# Altium PCB PCB.PcbDoc
Units mm, origin at the board's own origin, x right, y up, seen from the top; angles counter-clockwise.
Board outline 132.5 x 50 mm, 2 copper layers (Top Layer, Bottom Layer); 79 components, 66 nets, 304 pads, 112 vias.
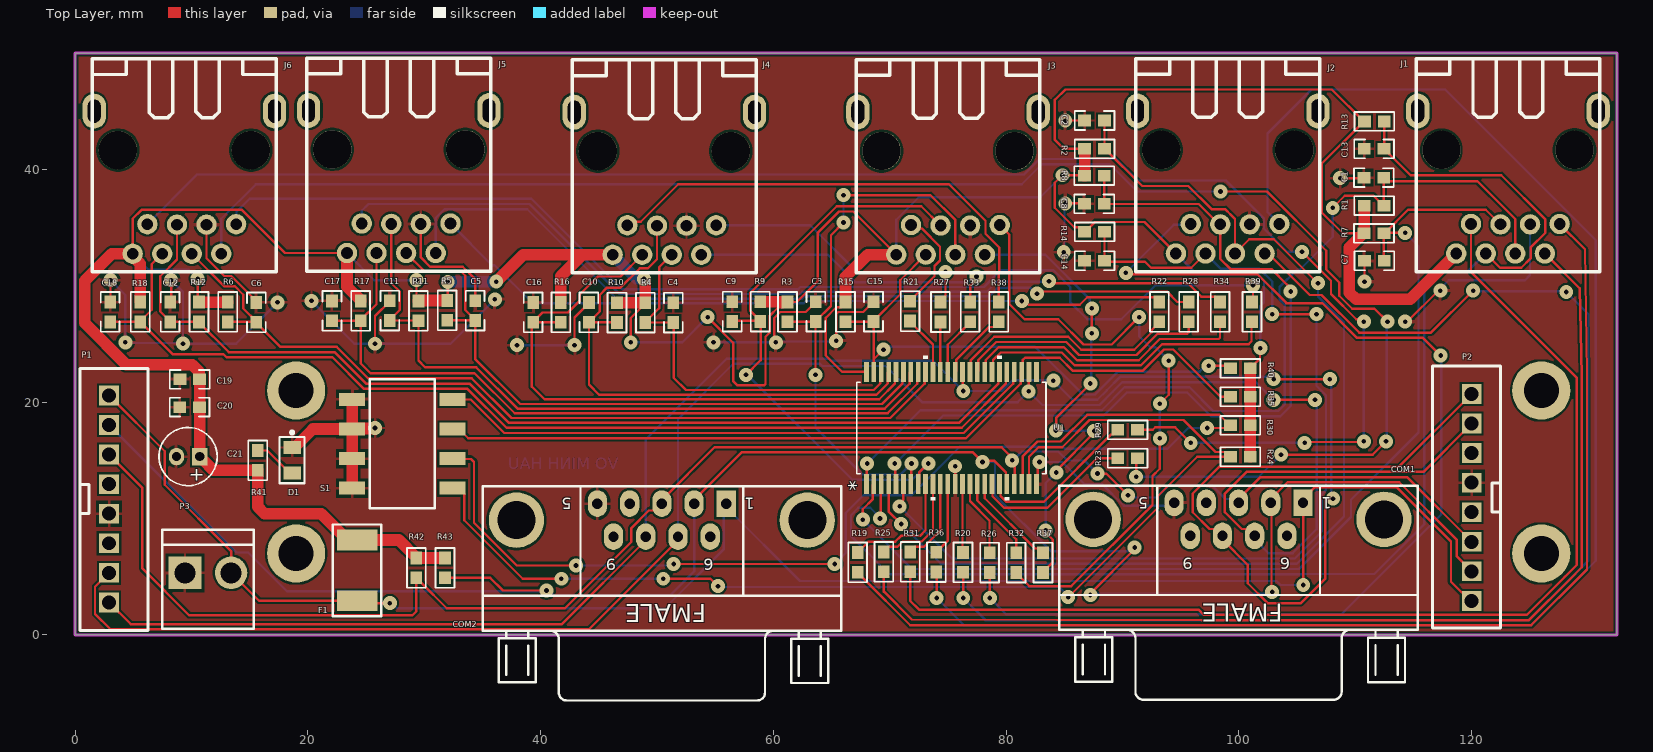
[diagram p0: Top Layer view]
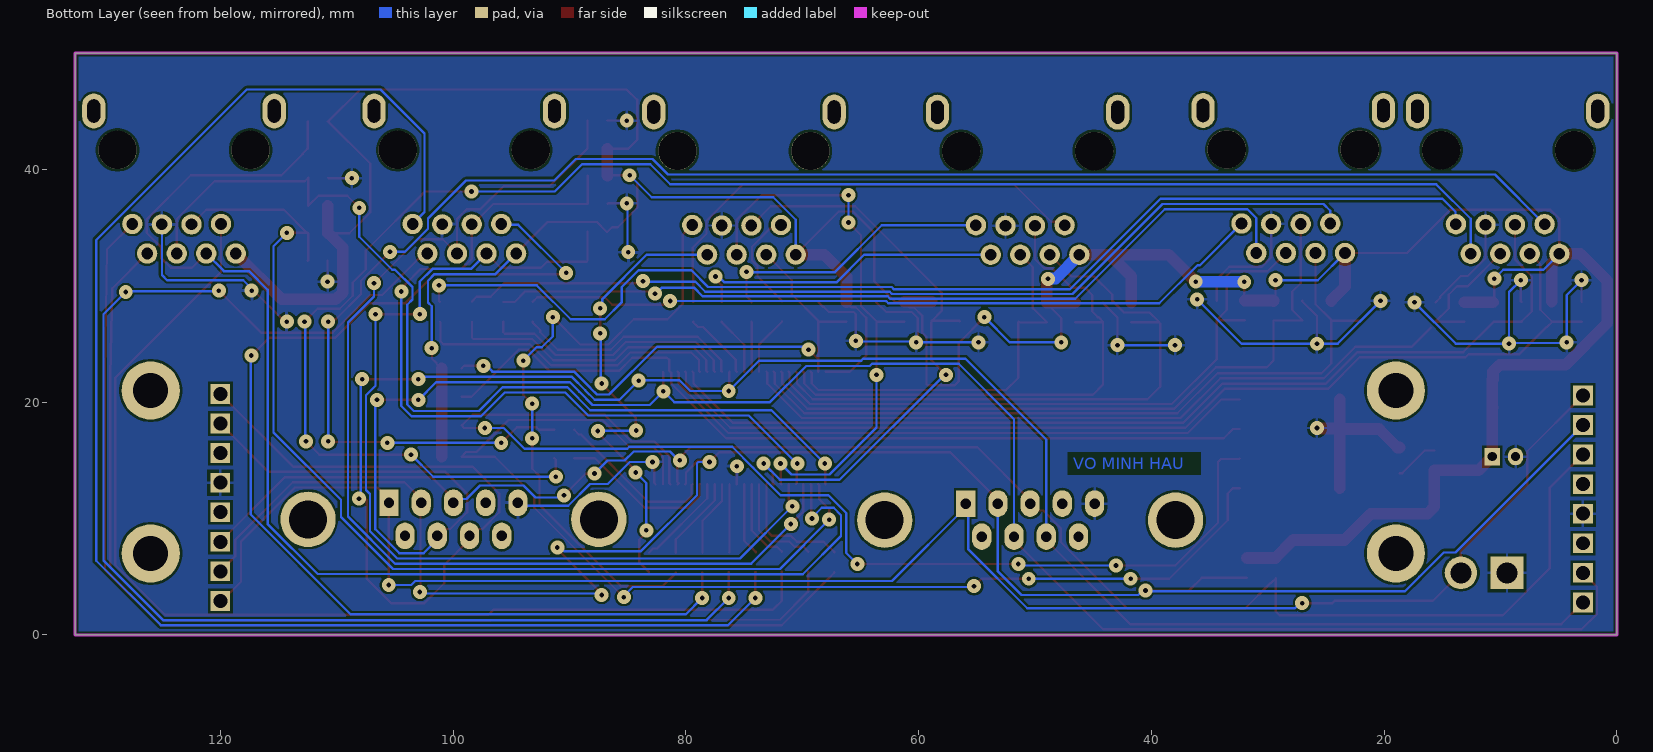
[diagram p1: Bottom Layer view, seen from below]
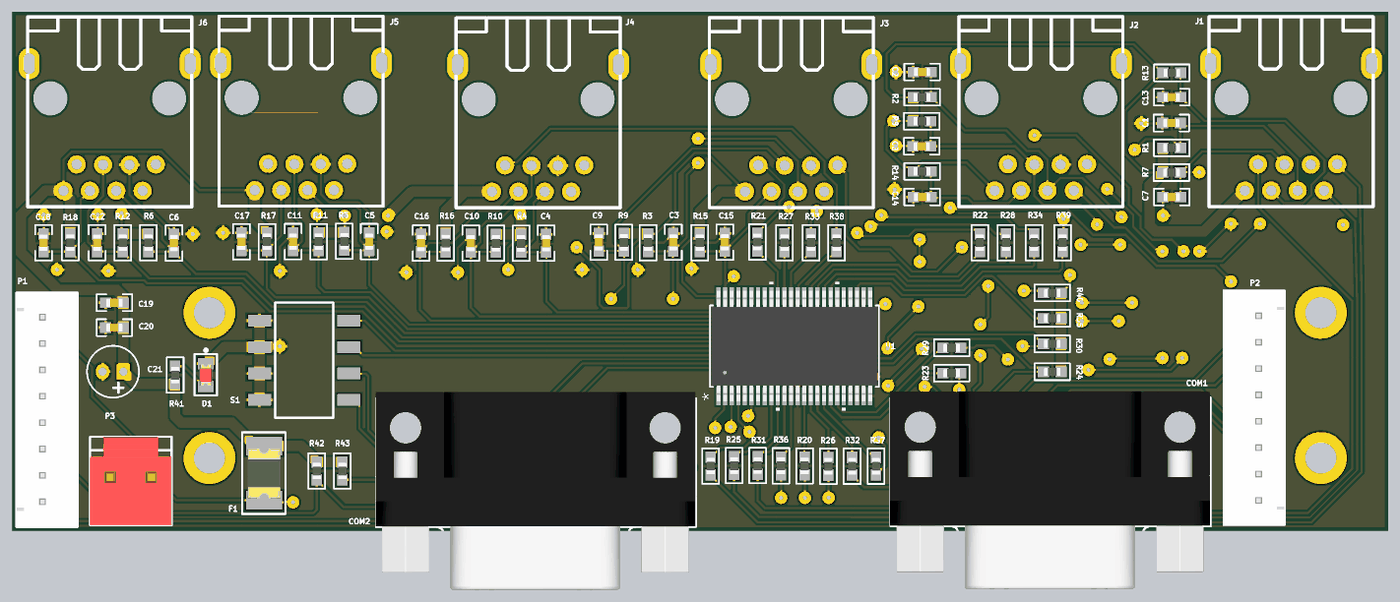
[diagram p2: 3D render of the assembled board from above, using the file's embedded part models]

## Layer stack, top to bottom
Top Solder: solder mask 0.0102, Solder Resist, Dk 3.5
Top Layer: signal copper 0.0356
Dielectric 1: dielectric 0.32, FR-4, Dk 4.8
Bottom Layer: signal copper 0.0356
Bottom Solder: solder mask 0.0102, Solder Resist, Dk 3.5

## Board outline
0,0 0,50 132.5,50 132.5,0

## Design rules (kind name [scope] priority, off if disabled: settings)
Clearance [All] p1: gap=0.2 ignorepadtopadclearanceinfootprint=FALSE
PolygonConnect [All] p1: connectstyle=Relief reliefconductorwidth=0.254 reliefentries=4 polygonreliefangle="90 Angle" airgapwidth=0.254
RoutingVias [All] p1: holewidth=0.4 width=1.2 viastyle="Through Hole" minholewidth=0.4 minwidth=1.2 maxholewidth=0.4 maxwidth=1.2
SolderMaskExpansion [All] p1: expansion=0.102 istentingtop=FALSE
Width [All] p1: maxlimit=1 minlimit=0.2 preferedwidth=0.5
30 further rules are at their usual default settings.

## Components (designator, comment, footprint, x,y, rotation, side; value= is the part's Value field where it differs from the comment)
C1 "0.1uF" "CAPC-0603 (1608)" 111.606,39.289 r0 top value=104/50V
C2 "0.1uF" "CAPC-0603 (1608)" 87.607,44.204 r0 top value=104/50V
C3 "0.1uF" "CAPC-0603 (1608)" 63.664,27.781 r270 top value=104/50V
C4 "0.1uF" "CAPC-0603 (1608)" 51.414,27.696 r270 top value=104/50V
C5 "0.1uF" "CAPC-0603 (1608)" 34.38,27.862 r270 top value=104/50V
C6 "0.1uF" "CAPC-0603 (1608)" 15.584,27.72 r270 top value=104/50V
C7 "0.1uF" "CAPC-0603 (1608)" 111.651,32.149 r0 top value=104/50V
C8 "0.1uF" "CAPC-0603 (1608)" 87.583,37.035 r0 top value=104/50V
C9 "0.1uF" "CAPC-0603 (1608)" 56.479,27.781 r270 top value=104/50V
C10 "0.1uF" "CAPC-0603 (1608)" 44.161,27.71 r270 top value=104/50V
C11 "0.1uF" "CAPC-0603 (1608)" 27.05,27.862 r270 top value=104/50V
C12 "0.1uF" "CAPC-0603 (1608)" 8.176,27.749 r270 top value=104/50V
C13 "0.1uF" "CAPC-0603 (1608)" 111.64,41.764 r0 top value=104/50V
C14 "0.1uF" "CAPC-0603 (1608)" 87.607,32.149 r0 top value=104/50V
C15 "0.1uF" "CAPC-0603 (1608)" 68.615,27.784 r270 top value=104/50V
C16 "0.1uF" "CAPC-0603 (1608)" 39.369,27.72 r270 top value=104/50V
C17 "0.1uF" "CAPC-0603 (1608)" 22.078,27.848 r270 top value=104/50V
C18 "0.1uF" "CAPC-0603 (1608)" 3.021,27.749 r270 top value=104/50V
C19 "0.1uF" "CAPC-0603 (1608)" 9.857,21.963 r180 top value=104/50V
C20 "0.1uF" "CAPC-0603 (1608)" 9.848,19.571 r0 top value=104/50V
C21 "10uF/16V" CAP_ALUM_D050_S20_H110 9.713,15.323 r180 top value=106/50V
COM1 "COM 9 FMALE" "DSB 9-F" 99.985,9.929 r180 top value="COM 9"
COM2 "COM 9 FMALE" "DSB 9-F" 50.428,9.862 r180 top value="COM 9"
D1 "2V/20mA" LED_0805_RED 18.655,15.004 r90 top
F1 "24V/1.5A" FUSE_1812(4532) 24.26,5.546 r90 top
J1 "RJ45-12P" RJ45-8PIN_18MM_NO_TRANSFORMER 123.134,49.524 r180 top
J2 "RJ45-12P" RJ45-8PIN_18MM_NO_TRANSFORMER 99.051,49.524 r180 top
J3 "RJ45-12P" RJ45-8PIN_18MM_NO_TRANSFORMER 75.018,49.43 r180 top
J4 "RJ45-12P" RJ45-8PIN_18MM_NO_TRANSFORMER 50.646,49.418 r180 top
J5 "RJ45-12P" RJ45-8PIN_18MM_NO_TRANSFORMER 27.818,49.565 r180 top
J6 "RJ45-12P" RJ45-8PIN_18MM_NO_TRANSFORMER 9.398,49.506 r180 top
P1 "Header 8P_W" "HDR1X8 - W" 2.921,11.684 r270 top
P2 "Header 8P_W" "HDR1X8 - W" 120.015,11.811 r90 top
P3 "Header 2P" VH3.96-2P 11.43,5.334 r0 top
R1 "10K" "RESC-0603 (1608)" 111.636,36.887 r180 top
R2 "10K" "RESC-0603 (1608)" 87.608,41.764 r180 top
R3 "10K" "RESC-0603 (1608)" 61.225,27.752 r90 top
R4 "10K" "RESC-0603 (1608)" 49.007,27.689 r90 top
R5 "10K" "RESC-0603 (1608)" 31.973,27.883 r90 top
R6 "10K" "RESC-0603 (1608)" 13.12,27.749 r90 top
R7 "10K" "RESC-0603 (1608)" 111.623,34.508 r180 top
R8 "10K" "RESC-0603 (1608)" 87.583,39.46 r180 top
R9 "10K" "RESC-0603 (1608)" 58.885,27.784 r90 top
R10 "10K" "RESC-0603 (1608)" 46.572,27.696 r90 top
R11 "10K" "RESC-0603 (1608)" 29.508,27.848 r90 top
R12 "10K" "RESC-0603 (1608)" 10.652,27.749 r90 top
R13 "10K" "RESC-0603 (1608)" 111.653,44.122 r180 top
R14 "10K" "RESC-0603 (1608)" 87.607,34.629 r180 top
R15 "10K" "RESC-0603 (1608)" 66.208,27.752 r90 top
R16 "10K" "RESC-0603 (1608)" 41.747,27.71 r90 top
R17 "10K" "RESC-0603 (1608)" 24.538,27.848 r90 top
R18 "10K" "RESC-0603 (1608)" 5.605,27.749 r90 top
R19 "10K" "RESC-0603 (1608)" 67.255,6.232 r90 top
R20 "10K" "RESC-0603 (1608)" 76.308,6.24 r90 top
R21 "10K" "RESC-0603 (1608)" 71.755,27.813 r270 top
R22 "10K" "RESC-0603 (1608)" 93.178,27.752 r270 top
R23 "10K" "RESC-0603 (1608)" 90.457,15.179 r180 top
R24 "10K" "RESC-0603 (1608)" 100.142,15.31 r180 top
R25 "10K" "RESC-0603 (1608)" 69.507,6.268 r90 top
R26 "10K" "RESC-0603 (1608)" 78.588,6.203 r90 top
R27 "10K" "RESC-0603 (1608)" 74.365,27.749 r270 top
R28 "10K" "RESC-0603 (1608)" 95.696,27.752 r270 top
R29 "10K" "RESC-0603 (1608)" 90.457,17.623 r180 top
R30 "10K" "RESC-0603 (1608)" 100.142,18.008 r180 top
R31 "10K" "RESC-0603 (1608)" 71.775,6.275 r90 top
R32 "10K" "RESC-0603 (1608)" 80.871,6.212 r90 top
R33 "10K" "RESC-0603 (1608)" 76.916,27.752 r270 top
R34 "10K" "RESC-0603 (1608)" 98.394,27.752 r270 top
R35 "10K" "RESC-0603 (1608)" 100.14,20.468 r180 top
R36 "10K" "RESC-0603 (1608)" 74.015,6.252 r90 top
R37 "10K" "RESC-0603 (1608)" 83.18,6.212 r90 top
R38 "10K" "RESC-0603 (1608)" 79.373,27.752 r270 top
R39 "10K" "RESC-0603 (1608)" 101.14,27.752 r270 top
R40 "10K" "RESC-0603 (1608)" 100.14,22.903 r180 top
R41 "470" "RESC-0603 (1608)" 15.698,14.998 r270 top value=470R
R42 "4.7K" "RESC-0603 (1608)" 29.328,5.754 r90 top value=470R
R43 "4.7K" "RESC-0603 (1608)" 31.793,5.754 r90 top value=470R
S1 "4bit/SMD" 219-4LPSTR 28.122,16.423 r180 top
U1 "CY8C9540A-24PVXI" SSOP-48 75.311,17.78 r90 top

## Footprints (in the part's own frame and the unit in brackets; to place one, negate y for a bottom-side part, rotate by r counter-clockwise, add the part's x,y. Pads: shape width x height; smd on the part's side, far side on the other; paste and mask are expansions set on the pad)
219-4LPSTR [mm] "SWITCH SLIDE DIP SPST 100MA 20V"
  rect 2.24x1.12 smd: 1(-4.305,3.81) 2(-4.305,1.27) 3(-4.305,-1.27) 4(-4.305,-3.81) 5(4.305,-3.81) 6(4.305,-1.27) 7(4.305,1.27) 8(4.305,3.81)
  silkscreen extent -2.8,-5.55 2.8,5.55, body extent -4.9,-5.55 4.9,5.55, height 3.7
CAP_ALUM_D050_S20_H110 [mm]
  rect 1.3x1.5 hole 0.8: 1(-1,0)
  oval 1.3x1.5 hole 0.8: 2(1,0)
  silkscreen extent -2.5,-2.5 2.5,2.5, body extent -2.5,-2.5 2.5,2.5, height 11
"CAPC-0603 (1608)" [mm] "Resistor, Chip; 1.60 mm L X 0.80 mm W X 0.50 mm H body"
  rect 1.1x1 smd mask+0.1: 1(-0.85,0) 2(0.85,0)
  silkscreen extent -1.71,-0.81 1.71,0.81, body extent -0.8,-0.4 0.8,0.4, height 0.6
"DSB 9-F" [mil] "COM FMALE - D Subminiature; 9 Position; Right Angle; Pitch 1.385 mm"
  rect 65x90 hole 35: 1(-218.11,-55.91)
  oval 65x90 hole 35: 2(-109.06,-55.91) 3(0,-55.91) 4(109.05,-55.91) 5(218.11,-55.91) 6(-163.58,55.91) 7(-54.53,55.91) 8(54.53,55.91) 9(163.58,55.91)
  round 187.4 hole 128.35: 10(-491.93,0) 11(491.93,0)
  silkscreen extent -606,-114 606,610, body extent -604,-138 608,613, height 495
FUSE_1812(4532) [mm]
  rect 1.78x3.5 smd: 1(-2.615,0) 2(2.615,0)
  silkscreen extent -3.94,-2.06 3.94,2.11, body extent -2.43,-1.61 2.39,1.61, height 1.32
"HDR1X8 - W" [mm] "0.1'' Header"
  rect 1.7x1.7 hole 1.2: 1(-8.89,0) 2(-6.35,0) 3(-3.81,0) 4(-1.27,0) 5(1.27,0) 6(3.81,0) 7(6.35,0) 8(8.89,0)
  silkscreen extent -11.23,-2.49 11.3,3.35, body extent -11.23,-2.49 11.23,3.35, height 7.21
LED_0805_RED [mm] "LED SMD; Body 2.0 x 1.3 mm (LxW typ)"
  rect 1.1x1.5 smd: 1(-1.1,0) 2(1.1,0)
  silkscreen extent -1.98,-1.07 2.52,1.09, body extent -1.01,-0.62 1.01,0.63, height 1.1
"RESC-0603 (1608)" [mm] "Resistor, Chip; 1.60 mm L X 0.80 mm W X 0.50 mm H body"
  rect 1.1x1 smd mask+0.1: 1(-0.85,0) 2(0.85,0)
  silkscreen extent -1.71,-0.81 1.71,0.81, body extent -0.8,-0.4 0.8,0.4, height 0.5
RJ45-8PIN_18MM_NO_TRANSFORMER [mm]
  oval 2x3 hole 1.1 slot 2 at 90 deg mask+0: 0(-7.75,4.5) 0(7.75,4.5)
  round 3.3 hole 3.3 unplated mask+0: 0(-5.715,7.85) 0(5.715,7.85)
  round 1.75 hole 1: 1(-4.44,14.21) 2(-3.17,16.75) 3(-1.9,14.25) 4(-0.63,16.75) 5(0.64,14.25) 6(1.91,16.75) 7(3.18,14.21) 8(4.45,16.75)
  silkscreen extent -7.9,0 7.9,18.3, body extent -7.9,0 7.9,18.3, height 13.2
SSOP-48 [mil]
  rect 68x16 smd paste+0 mask+0: 1(-190,287.5) 2(-190,262.5) 3(-190,237.5) 4(-190,212.5) 5(-190,187.5) 6(-190,162.5) 7(-190,137.5) 8(-190,112.5) 9(-190,87.5) 10(-190,62.5) 11(-190,37.5) 12(-190,12.5) 13(-190,-12.5) 14(-190,-37.5) 15(-190,-62.5) 16(-190,-87.5) 17(-190,-112.5) 18(-190,-137.5) 19(-190,-162.5) 20(-190,-187.5) 21(-190,-212.5) 22(-190,-237.5) 23(-190,-262.5) 24(-190,-287.5) 25(190,-287.5) 26(190,-262.5) 27(190,-237.5) 28(190,-212.5) 29(190,-187.5) 30(190,-162.5) 31(190,-137.5) 32(190,-112.5) 33(190,-87.5) 34(190,-62.5) 35(190,-37.5) 36(190,-12.5) 37(190,12.5) 38(190,37.5) 39(190,62.5) 40(190,87.5) 41(190,112.5) 42(190,137.5) 43(190,162.5) 44(190,187.5) 45(190,212.5) 46(190,237.5) 47(190,262.5) 48(190,287.5)
  silkscreen extent -244,-320 244,320, body extent -210,-315 210,315, height 110
VH3.96-2P [mm]
  rect 2.8x2.8 hole 1.8: 1(-1.98,0)
  round 2.8 hole 1.8: 2(1.98,0)
  silkscreen extent -3.94,-4.8 3.94,3.7, body extent -3.94,-4.8 3.92,3.7, height 10.6

## Part data
C1 C2 C3 C4 C5 C6 C7 C8 C9 C10 C11 C12 C13 C14 C15 C16 C17 C18 C19 C20: library part C0603C104K5RACTU, "CAP CER 0.1uF 50V 10% X7R 0603", Category=CAPACITOR, CompanyID=VT-00982, MPN=C0603C104K5RACTU, PinCount=2, Solder=SMT
C21: library part 106CKR050M, "CAP ALUM 10uF 50V 20% RADIAL", Category=CAPACITOR, CompanyID=VT-00054, MPN=106CKR050M, PinCount=2, Solder=WAVE
COM1 COM2: library part DSB9F, "COM 9", PackageDocument=O, DatasheetDocument=1-Sep-1999, Gender=Receptacle, LatestRevisionDate=17-Jul-2002, LatestRevisionNote="Re-released for DXP Platform.", Orientation="Right Angle", PackageReference=788750, Positions=9, Published=15-Jun-2001, Publisher="Altium Limited"
D1: library part 17-215SURC/S530-A3/TR8, "LED RED CLEAR 0805 SMD", CompanyID=VT-00379, MPN=17-215SURC/S530-A3/TR8, Solder=SMT
F1: library part 1812L150/24MR, "FUSE PTC RESETTABLE 24V 1.50A 1812L", CompanyID=VT-00870, MPN=1812L150/24MR, Solder=SMT
J1 J2 J3 J4 J5 J6: library part RJ45-12PIN_NO_TRANSFORMER, Solder=WAVE
P1 P2: library part "Header 8x1", "Header, 8 Pin Pitch 2.54mm", Solder=WAVE
P3: library part VH3.96-2P, "Header, 2 Pin Pitch 3.96mm", MPN=VH3.96-2P, Solder=WAVE
R1 R2 R3 R4 R5 R6 R7 R8 R9 R10 R11 R12 R13 R14 R15 R16 R17 R18 R19 R20 R21 R22 R23 R24 R25 R26 R27 R28 R29 R30 R31 R32 R33 R34 R35 R36 R37 R38 R39 R40: library part RC0603FR-0710KL, "RES SMD 10K OHM 1% 1/10W 0603", Category=RESISTOR, CompanyID=VT-00328, MPN=RC0603FR-0710KL, Solder=SMT
R41 R42 R43: library part RC0603FR-07470RL, "RES SMD 470 OHM 1% 1/10W 0603", Category=RESISTOR, CompanyID=VT-01176, MPN=RC0603FR-07470RL, Solder=SMT
S1: library part 219-4LPSTR, "SWITCH SLIDE DIP SPST 100MA 20V", CompanyID=VT-xxxx, MPN=219-4LPSTR, Solder=SMT
U1: "No Description Available", Mfr_Name="Cypress Semiconductor", Digi-Key_Part_Number_1=2015-CY8C9540A-24PVXI-ND, Digi-Key_Part_Number_2=428-2016-5-ND, Digi-Key_Part_Number_3=2156-CY8C9540A-24PVXI-ND, RefDes=RefDes, Type=Type

## Free pads (board coordinates)
  round 5 hole 3: 1(19,7) 2(19,21) 3(126,21) 4(126,7)

## Via types
v1: diameter 1.2, hole 0.4, Top Layer to Bottom Layer, 112 vias

## Nets (pads, with @x,y where several pads share a name; then routed paths per layer and width w, separated by ;. In a path a pad name is that pad's centre, name@x,y a point inside that pad or via, vN(x,y) a via of type N, cw(c..) or ccw(c..) an arc to the next point about the centre after c; other vN are vias at no path point)
0: J1.1 R19.1 | length 97.2
  Top Layer w0.2: R19.1 67.255,5.332 67.655,4.932 67.657,4.932 71.768,0.821 125.124,0.821 129.748,5.444 129.932,5.629 129.932,22.471 129.75,33.138 129.691,33.197 J1.1
1: J1.2 R25.1 | length 92.7
  Top Layer w0.2: R25.1 69.507,3.718 71.896,1.33 96.802,1.271 124.938,1.271 128.458,4.791 129.482,5.815 129.482,22.284 129.3,29.778 129.241,29.837 J1.2
2: J1.7 R31.1 | length 95.1
  Top Layer w0.2: R31.1 71.775,2.913 72.517,2.171 96.538,2.171 96.988,1.721 124.752,1.721 128.008,4.977 ; J1.7 119.954,31.176 128.973,22.157 129.032,22.098 129.032,6.002 128.973,5.943 128.023,4.992 ; 128.008,4.978 ccw(c126,7) 128.022,4.992
3: J2.1 R36.1 | length 133.1
  Top Layer w0.2: R36.1 74.041,5.376 v1(74.041,3.172)
  Bottom Layer w0.2: v1(74.041,3.172) 76.392,0.821 125.124,0.821 130.683,6.38 130.683,33.938 117.747,46.874 106.242,46.874 102.465,43.097 102.465,36.34 J2.1
4: J2.2 R20.1 | length 113
  Top Layer w0.2: R20.1 76.327,5.371 v1(76.327,3.172) ; J2.2 102.533,32.774 106.092,29.215 107.109,29.215 110.35,25.974 116.525,25.974 120.131,29.58 v1(120.142,29.58)
  Bottom Layer w0.2: v1(76.327,3.172) 78.228,1.271 124.938,1.271 130.048,6.381 130.048,27.559 v1(128.143,29.464) 128.079,29.527 120.194,29.527 v1(120.142,29.58)
5: J2.7 R26.1 | length 96.1
  Top Layer w0.2: R26.1 78.613,5.329 v1(78.613,3.172) ; v1(90.297,31.115) 90.427,30.985 101.618,30.985 104.094,28.509 107.179,28.509 110.164,25.524 115.827,25.524 v1(117.348,24.003)
  Bottom Layer w0.2: v1(78.613,3.172) 80.007,1.778 108.826,1.778 117.403,10.354 117.403,23.948 v1(117.348,24.003) ; v1(90.297,31.115) 94.426,35.244 95.801,35.244 J2.7
5DC: COM1.1 COM2.1 F1.1 P1.1 P2.1 P3.2 | length 150.3
  Top Layer w0.2: P1.1 7.713,15.782 7.713,12.897 13.41,7.2 P3.2 15.813,2.931 F1.1 24.396,2.794 24.457,2.733 v1(27.051,2.733) ; v1(105.544,4.282) 105.537,4.288 105.537,11.337 COM1.1 105.525,11.667 106.517,12.659 113.611,12.659 118.237,8.033 118.237,4.572 119.138,3.671 119.265,3.671 P2.1
  Bottom Layer w0.2: v1(27.051,2.733) 27.221,2.733 27.668,2.286 50.674,2.286 55.759,7.37 55.759,11.072 COM2.1 55.968,10.964 62.3,4.633 103.264,4.633 103.615,4.282 v1(105.544,4.282)
5V: C19.1 C20.2 C21.1 F1.2 J1.8 J2.8 J3.8 J4.8 J5.8 J6.8 R1.2 R2.2 R3.2 R4.2 R5.2 R6.2 R7.2 R8.2 R9.2 R10.2 R11.2 R12.2 R13.2 R14.2 R15.2 R16.2 R17.2 R18.2 R24.1 R30.1 R35.1 R40.1 R41.2 R42.2 R43.2 U1.48 | length 333.4
  Top Layer w0.2: J6.8 4.948,35.758 5.711,36.521 14.345,36.521 18.051,32.815 J5.8 ; v1(10.541,30.607) 10.541,28.711 R12.2 ; v1(29.337,30.48) 29.337,28.869 R11.2 ; R5.2 32.029,28.789 v1(32.029,30.34) ; v1(47.752,25.146) 47.752,27.234 49.007,28.489 R4.2 ; v1(54.356,27.305) 56.551,25.11 56.551,21.808 56.917,21.442 59.211,21.442 59.328,21.56 59.328,25.616 59.685,25.972 59.685,27.402 60.435,28.152 60.825,28.152 61.225,28.552 R3.2 ; R3.2@61.225,28.634 R3.2 ; R15.2 66.208,28.552 65.808,28.152 65.418,28.152 64.505,27.239 64.505,24.014 65.913,22.606 U1.48 ; J3.8 66.865,36.383 65.646,36.383 63.836,34.572 63.836,30.413 62.025,28.602 R3.2 ; R8.2 86.697,39.497 v1(84.836,39.497) 84.19,38.851 84.19,36.711 85.872,35.029 86.357,35.029 R14.2 86.807,34.629 87.657,35.479 91.896,35.479 J2.8 ; R2.2 84.982,41.764 84.26,42.486 84.201,42.545 84.19,44.19 cw(c85.09,44.196) 84.19,44.202 84.201,45.974 84.26,46.033 85.101,46.874 108,46.874 R13.2@110.753,44.122 ; R40.1 101.04,22.903 101.44,23.303 101.44,23.353 101.825,23.738 101.825,24.609 v1(101.854,24.638) ; R7.2 110.723,34.508 108.928,34.508 107.127,36.309 107.127,40.496 R13.2@110.753,44.122 ; R13.2 R13.2@110.753,44.122
  Top Layer w1: R18.2@5.605,28.649 5.605,31.896 4.948,32.553 J6.8 3.165,32.756 0.827,30.418 0.827,26.799 4.413,23.213 10.072,23.213 10.657,22.627 C19.1@10.657,21.963 ; R12.2 R6.2 ; C20.2 C20.2@10.705,19.571 ; C19.1 10.707,19.571 C20.2@10.705,19.571 ; J5.8 23.368,29.918 24.538,28.748 R17.2 ; R11.2 29.508,28.733 R5.2 ; R43.2 R42.2 29.328,6.654 27.821,8.161 F1.2 23.4,8.161 21.146,10.414 16.284,10.414 15.698,11 R41.2 11.888,14.148 10.963,15.073 10.863,15.073 10.713,15.223 C21.1 10.705,15.331 C20.2@10.705,19.571 ; v1(36.195,30.353) 38.51,32.668 43.59,32.668 ; R16.2 41.747,30.825 43.59,32.668 ; J4.8 43.59,32.668 ; R10.2 R4.2@49.007,28.546 ; v1(48.895,30.593) 48.895,30.539 49.007,30.427 R4.2@49.007,28.546 ; R4.2 R4.2@49.007,28.546 ; R9.2 R3.2@61.225,28.634 ; R15.2 66.208,30.775 68.113,32.68 J3.8 ; R8.2 86.758,39.46 R2.2 ; R40.1 R35.1 100.99,18.008 100.992,18.008 R24.1 ; R7.2@110.723,34.508 109.501,33.286 109.501,29.415 110.087,28.829 114.739,28.829 J1.8 ; R7.2 110.786,34.508 R1.2
  Bottom Layer w0.2: J6.8 6.324,31.38 9.768,31.38 v1(10.541,30.607) ; J5.8 25.703,30.48 v1(29.337,30.48) ; v1(47.752,25.146) 52.197,25.146 v1(54.356,27.305) ; J3.8 70.568,35.682 72.498,37.612 82.951,37.612 v1(84.836,39.497) ; J2.8 96.372,31.003 101.599,31.003 102.174,30.429 102.174,28.56 101.854,28.24 v1(101.854,24.638)
  Bottom Layer w1: v1(32.029,30.34) 32.035,30.347 36.189,30.347 v1(36.195,30.353) ; J4.8 48.232,30.631 48.857,30.631 v1(48.895,30.593)
6: J3.1 R32.1 | length 53.9
  Top Layer w0.2: J3.1 80.277,34.401 80.277,28.429 81.589,27.117 84.495,27.117 86.654,24.958 89.093,24.958 v1(91.44,27.305) ; R32.1 80.871,5.312 81.992,4.191 85.613,4.191 92.583,11.161 92.583,13.642 93.218,14.277 v1(93.218,16.894) ; v1(93.218,19.873) 93.98,20.635 v1(93.98,23.573)
  Bottom Layer w0.2: v1(91.44,27.305) 91.44,25.663 92.389,24.713 92.839,24.713 v1(93.98,23.573) ; v1(93.218,16.894) v1(93.218,19.873)
7: J3.2 R37.1 | length 41
  Top Layer w0.2: R37.1 83.18,5.412 84.03,6.262 84.03,8.172 83.412,8.79 v1(83.412,8.99) ; v1(84.289,17.562) 84.328,17.601 84.328,18.669 87.249,21.59 v1(87.249,21.607) ; v1(84.328,13.959) 84.328,14.124 87.573,17.369 v1(87.573,17.523) ; v1(87.376,25.908) v1(87.376,28.067)
  Bottom Layer w0.2: J3.2 83.369,32.68 87.185,28.864 87.185,28.258 v1(87.376,28.067) ; v1(83.412,8.99) 83.412,13.054 84.317,13.959 v1(84.328,13.959) ; v1(84.289,17.562) 84.308,17.542 87.554,17.542 v1(87.573,17.523) ; v1(87.249,21.607) 87.312,21.67 87.312,25.845 v1(87.376,25.908)
8: J3.7 R21.1 | length 9
  Top Layer w0.2: R21.1 71.755,28.713 73.853,30.811 73.853,31.692 74.333,32.172 74.333,33.363 72.773,34.923 72.135,34.923 J3.7
9: J4.1 R27.1 | length 24.2
  Top Layer w0.2: R27.1 74.365,28.649 74.765,29.049 74.765,29.128 74.803,29.166 v1(74.803,31.194)
  Bottom Layer w0.2: J4.1 63.171,35.208 67.203,31.176 74.785,31.176 v1(74.803,31.194)
10: J4.2 R33.1 | length 27.3
  Top Layer w0.2: R33.1 76.916,29.888 76.939,29.911 76.939,30.052 77.47,30.583 v1(77.47,30.794)
  Bottom Layer w0.2: J4.2 64.695,32.668 67.069,30.294 76.699,30.294 77.199,30.794 v1(77.47,30.794)
11: J4.7 R38.1 | length 41
  Top Layer w0.2: J4.7 47.762,35.504 48.61,35.504 51.838,38.733 75.097,38.733 78.233,35.597 78.233,34.475 79.413,33.295 79.413,31.193 79.373,31.153 R38.1
12: J5.1 R22.1 | length 64.4
  Top Layer w0.2: v1(81.356,28.694) 81.627,28.694 81.945,28.375 86.341,28.375 86.982,29.017 92.778,29.017 93.178,28.617 R22.1
  Bottom Layer w0.2: J5.1 35.842,31.771 36.049,31.771 39.328,28.493 62.623,28.493 62.824,28.694 v1(81.356,28.694)
13: J5.2 R28.1 | length 72.3
  Top Layer w0.2: v1(82.661,29.325) 82.838,29.502 93.823,29.502 94.723,28.602 R28.1
  Bottom Layer w0.2: J5.2 30.988,35.817 31.751,36.58 38.855,36.58 46.542,28.893 62.457,28.893 62.658,29.094 78.573,29.094 79.32,29.841 82.07,29.841 82.585,29.325 v1(82.661,29.325)
14: J5.7 R34.1 | length 79.5
  Top Layer w0.2: v1(83.689,30.402) 83.88,30.211 95.632,30.211 96.791,29.052 97.994,29.052 98.394,28.652 R34.1
  Bottom Layer w0.2: J5.7 24.638,36.449 25.219,37.03 39.042,37.03 46.779,29.293 62.292,29.293 62.493,29.494 78.337,29.494 79.191,30.349 83.635,30.349 v1(83.689,30.402)
15: J6.1 R39.1 | length 98
  Top Layer w0.2: R39.1 101.224,28.686 v1(101.224,30.035)
  Bottom Layer w0.2: J6.1 13.875,35.333 13.875,36.354 15.001,37.48 39.228,37.48 47.015,29.693 62.126,29.693 62.327,29.894 78.101,29.894 79.536,31.33 84.082,31.33 85.532,29.88 85.532,28.567 86.982,27.117 89.908,27.117 92.827,30.035 v1(101.224,30.035)
16: J6.2 R23.1 | length 147.1
  Top Layer w0.2: v1(91.186,13.589) 91.186,15.057 R23.1 ; v1(98.425,38.1) 102.438,38.1 107.524,33.014 107.524,31.404 108.64,30.288 108.64,29.145 109.755,28.029 111.671,28.029 v1(112.776,26.924) ; v1(103.632,15.494) 111.506,15.494 v1(112.649,16.637)
  Bottom Layer w0.2: J6.2 12.568,35.758 15.543,38.733 81.352,38.733 83.066,40.447 88.937,40.447 91.284,38.1 v1(98.425,38.1) ; v1(91.186,13.589) 101.727,13.589 v1(103.632,15.494) ; v1(112.649,16.637) 112.712,16.7 112.712,26.86 v1(112.776,26.924)
17: J6.7 R29.1 | length 144.2
  Top Layer w0.2: R29.1 92.603,17.623 92.824,17.844 94.531,17.844 v1(95.875,16.5) ; v1(105.437,32.92) 107.921,30.436 107.921,29.298 110.103,27.115 110.553,27.115 v1(110.744,26.924) ; v1(105.664,16.51) 105.727,16.573 110.68,16.573 v1(110.744,16.637)
  Bottom Layer w0.2: J6.7 10.49,39.568 81.55,39.568 82.879,40.897 89.47,40.897 91.317,39.05 98.908,39.05 102.176,35.782 102.176,34.897 104.153,32.92 v1(105.437,32.92) ; v1(95.875,16.5) 95.88,16.505 105.659,16.505 v1(105.664,16.51) ; v1(110.744,16.637) v1(110.744,26.924)
ADD: R24.2 S1.1 U1.23 | length 100
  Top Layer w0.2: S1.1 32.987,12.613 33.447,12.153 33.447,9.851 38.472,4.826 v1(41.783,4.826) ; v1(50.546,4.826) 54.607,4.826 55.242,4.191 v1(55.245,4.191) ; U1.23 81.978,15.306 82.795,16.123 84.83,16.123 87.18,18.473 95.246,18.473 98.008,15.71 98.892,15.71 R24.2 ; v1(85.344,3.241) 93.033,10.93 93.033,11.917 96.426,15.31 R24.2@99.242,15.31
  Bottom Layer w0.2: v1(41.783,4.826) v1(50.546,4.826) ; v1(55.245,4.191) 55.314,4.122 84.573,4.122 85.344,3.351 v1(85.344,3.241)
GND: C1.1 C2.1 C3.1 C4.1 C5.1 C6.1 C7.1 C8.1 C9.1 C10.1 C11.1 C12.1 C13.1 C14.1 C15.1 C16.1 C17.1 C18.1 C19.2 C20.1 C21.2 COM1.5 COM2.5 D1.2 J1.3 J2.3 J3.3 J4.3 J5.3 J6.3 P1.5 P2.5 P3.1 S1.5 S1.6 S1.7 S1.8 U1.13 U1.24 | length 164.7
  Top Layer w0.2: C18.1 3.048,28.627 v1(3.048,30.48) ; C12.1 8.255,28.679 v1(8.255,30.48) ; J6.3 11.298,32.364 12.826,30.837 13.417,30.837 15.184,29.07 15.184,28.97 C6.1 ; v1(25.781,25.019) 25.781,27.393 27.05,28.662 C11.1 ; J5.3 29.718,32.423 30.502,31.64 33.315,31.64 34.38,30.575 C5.1 ; v1(42.926,24.892) 42.926,27.275 44.161,28.51 C10.1 ; v1(60.228,25.146) 60.085,25.289 60.085,27.236 60.601,27.752 62.785,27.752 63.214,28.181 63.264,28.181 63.664,28.581 C3.1 ; v1(65.405,25.273) 65.405,27.573 65.584,27.752 67.732,27.752 68.165,28.184 68.215,28.184 68.615,28.584 C15.1 ; U1.13 v1(75.629,14.491) ; U1.24 82.717,13.057 82.717,14.697 v1(82.879,14.859) ; v1(85.09,37.084) 86.685,37.084 C8.1 ; v1(85.09,44.196) 86.307,44.196 C2.1 ; v1(108.712,39.243) 110.71,39.243 C1.1 ; v1(110.801,30.353) C7.1 ; v1(114.3,26.924) 114.486,26.924 117.142,29.58 v1(117.329,29.58)
  Top Layer w1: D1.2 18.855,16.104 20.444,17.693 S1.6 ; S1.8 S1.7 S1.6 ; S1.5 S1.6 ; v1(25.781,17.78) 25.743,17.742 23.866,17.742 S1.6
  Bottom Layer w0.2: v1(3.048,30.48) 4.318,29.21 v1(4.318,25.146) 4.376,25.088 9.213,25.088 v1(9.271,25.03) ; v1(8.255,30.48) 9.271,29.464 v1(9.271,25.03) ; v1(17.399,28.575) 13.854,25.03 v1(9.271,25.03) ; v1(20.32,28.702) 24.003,25.019 v1(25.781,25.019) 32.258,25.019 v1(36.068,28.829) ; v1(37.973,24.892) v1(42.926,24.892) ; v1(54.864,25.146) v1(60.228,25.146) ; v1@60.228,25.209 65.341,25.209 v1(65.405,25.273) ; v1(82.879,14.859) 84.836,14.859 86.725,12.97 88.239,12.97 90.111,11.098 94.194,11.098 COM1.5 ; v1(84.963,32.893) 85.026,32.956 85.026,37.02 v1(85.09,37.084) ; v1(117.329,29.58) 117.329,29.763 118.045,30.48 124.587,30.48 125.034,30.927 J1.3
INT: COM1.7 COM2.7 P1.7 P2.7 U1.26 | length 177.2
  Top Layer w0.2: P1.7 1.721,4.134 1.721,1.799 3.043,0.477 44.166,0.477 51.813,8.124 COM2.7 ; v1(81.941,20.929) 81.96,20.948 81.96,22.587 U1.26 ; COM1.7 100.775,9.104 100.25,9.104 98.809,10.545 98.809,12.153 100.666,14.01 115.864,14.01 P2.7 ; v1(102.997,20.193) v1(106.553,20.193)
  Bottom Layer w0.2: COM2.7 51.813,18.539 56.566,23.292 64.021,23.292 64.202,23.111 69.671,23.111 72.777,20.005 81.017,20.005 v1(81.941,20.929) 83.114,19.757 88.032,19.757 89.161,20.885 89.161,20.894 89.989,21.723 101.467,21.723 v1(102.997,20.193) ; COM1.7 101.37,8.191 102.545,7.016 104.627,7.016 106.426,8.815 106.7,9.09 106.7,20.046 v1(106.553,20.193)
NetD1_1: D1.1 R41.1 | length 3.8
  Top Layer w0.2: R41.1 16.511,15.848 18.455,13.904 D1.1
P0B0: C1.2 J1.4 R1.1 U1.1 | length 83.9
  Top Layer w0.2: U1.1 68.04,12.986 68.04,14.7 v1(68.072,14.732) ; v1(108.077,36.703) 109.111,37.737 111.586,37.737 112.436,36.887 R1.1 112.456,36.917 C1.2 112.755,38.989 120.512,38.989 123.764,35.737 J1.4
  Bottom Layer w0.2: v1(68.072,14.732) 72.647,19.307 88.219,19.307 90.184,21.273 95.768,21.273 97.798,19.243 103.391,19.243 103.947,19.799 103.947,28.376 103.505,28.818 103.505,29.891 105,31.386 105.246,31.386 108.077,34.216 v1(108.077,36.703)
P0B1: C7.2 J1.5 R7.1 U1.2 | length 91.8
  Top Layer w0.2: v1(67.691,9.906) 67.691,10.795 68.562,11.666 68.562,12.872 U1.2 ; C7.2 112.473,32.177 R7.1 112.509,34.544 R7.1@112.559,34.544 ; v1(114.3,34.544) R7.1@112.559,34.544 ; J1.5 121.229,36.539 114.554,36.539 R7.1@112.559,34.544
  Bottom Layer w0.2: v1(67.691,9.906) 71.931,5.666 105.186,5.666 109.65,10.13 109.65,11.606 115.443,17.399 115.443,33.401 v1(114.3,34.544)
P0B2: C13.2 J1.6 R13.1 U1.3 | length 114.4
  Top Layer w0.2: v1(69.178,10.003) 69.247,10.071 69.247,12.922 U1.3 ; R13.1 112.49,44.109 C13.2 112.54,41.764 112.94,41.364 112.94,41.314 114.756,39.497 122.555,39.497 126.349,35.703 126.349,34.552 125.079,33.282 125.079,32.357 124.271,31.549 122.449,31.549 J1.6
  Bottom Layer w0.2: v1(69.178,10.003) 69.178,10.07 68.326,10.922 67.31,10.922 66.675,10.287 66.675,8.509 69.968,5.216 105.372,5.216 105.388,5.232 111.643,5.232 115.951,9.539 115.951,29.658 117.554,31.261 119.711,31.261 J1.6
P0B3: C2.2 J2.4 R2.1 U1.4 | length 94.3
  Top Layer w0.2: U1.4 69.913,10.604 v1(70.993,9.525) ; C2.2 R2.1 88.508,41.764 91.699,38.573 95.666,38.573 97.604,36.635 97.663,36.576 98.842,36.576 98.9,36.517 99.271,36.147 99.273,36.145 cw(c98.411,35.274) 99.282,36.135 99.681,35.737 J2.4 100.906,33.999 103.014,33.999 106.787,30.226 v1(106.807,30.226)
  Bottom Layer w0.2: v1(70.993,9.525) 74.402,6.116 105,6.116 109.05,10.167 109.05,26.84 106.807,29.083 v1(106.807,30.226)
P0B4: C8.2 J2.5 R8.1 U1.5 | length 72.9
  Top Layer w0.2: v1(70.432,14.732) 70.49,14.674 70.49,13.012 U1.5 ; R8.1 C8.2 96.568,37.035 98.328,35.274 J2.5 98.411,32.312 99.288,31.435 102.804,31.435 104.162,30.077 104.162,30.072 104.461,29.774 v1(104.461,29.503)
  Bottom Layer w0.2: v1(70.432,14.732) 70.485,14.732 74.61,18.857 88.405,18.857 90.371,20.823 95.582,20.823 97.612,18.793 103.577,18.793 104.461,19.677 v1(104.461,29.503)
P0B5: C14.2 J2.6 R14.1 U1.6 | length 85.6
  Top Layer w0.2: v1(70.866,11.049) 70.866,11.32 71.183,11.637 U1.6 ; R14.1 C14.2 88.542,32.065 91.944,32.065 92.46,31.549 95.916,31.549 J2.6 ; v1(102.87,27.559) v1(106.68,27.559)
  Bottom Layer w0.2: v1(70.866,11.049) 75.349,6.566 104.813,6.566 107.15,8.903 107.15,12.103 107.503,12.455 107.503,20.587 106.68,21.41 v1(106.68,27.559) ; J2.6 98.462,31.453 101.786,31.453 102.87,30.369 v1(102.87,27.559)
P0B6: C3.2 J3.4 R3.1 U1.7 | length 48.9
  Top Layer w0.2: R3.1 C3.2@63.627,26.902 ; v1(63.627,22.342) C3.2@63.627,26.902 ; v1(66.04,35.433) 64.956,34.349 64.956,28.273 63.627,26.944 C3.2@63.627,26.902 ; v1(66.04,37.783) 73.507,37.783 75.648,35.642 J3.4 ; U1.7 71.85,12.986 71.85,14.7 v1(71.882,14.732)
  Bottom Layer w0.2: v1(63.627,22.342) 63.627,17.833 67.678,13.782 70.932,13.782 v1(71.882,14.732) ; v1(66.04,35.433) v1(66.04,37.783)
P0B7: C9.2 J3.5 R9.1 U1.8 | length 52.6
  Top Layer w0.2: C9.2 56.532,26.984 58.885,26.984 58.035,27.834 58.035,29.408 65.46,36.833 72.725,36.833 J3.5 ; v1(57.658,22.342) 58.928,23.612 58.928,26.891 R9.1 ; U1.8 72.535,13.036 72.535,13.963 73.305,14.732 v1(73.332,14.732)
  Bottom Layer w0.2: v1(57.658,22.342) 57.795,22.342 66.805,13.332 71.932,13.332 v1(73.332,14.732)
P1B0: C15.2 J3.6 R15.1 R40.2 U1.47 | length 48.3
  Top Layer w0.2: R15.1 68.582,26.902 C15.2 ; U1.47 68.644,23.685 ; v1(69.469,24.511) 68.644,23.685 ; J3.6 70.905,30.476 70.905,29.275 68.615,26.984 C15.2 ; v1(97.409,23.123) 99.07,23.123 R40.2 ; C15.2 68.644,26.905 68.644,23.685
  Bottom Layer w0.2: v1(69.469,24.511) 69.723,24.765 82.497,24.765 86.605,20.657 87.659,20.657 88.202,21.199 88.202,21.208 89.617,22.623 96.638,22.623 97.138,23.123 v1(97.409,23.123)
P1B1: C4.2 J4.4 R4.1 U1.46 | length 33.5
  Top Layer w0.2: J4.4 50.193,31.585 50.193,28.075 49.007,26.889 R4.1 51.407,26.839 C4.2 ; C4.2@51.414,26.896 C4.2 ; U1.46 69.197,22.524 69.197,21.597 68.642,21.042 52.491,21.042 51.435,22.098 51.435,26.825 C4.2
P1B2: C10.2 J4.5 R10.1 U1.45 | length 47.1
  Top Layer w0.2: R10.1 46.558,26.86 C10.2 ; J4.5 50.006,32.276 49.222,31.493 48.522,31.493 46.874,29.845 45.72,29.845 45.085,29.21 45.085,27.784 44.611,27.31 44.561,27.31 44.161,26.91 C10.2 ; U1.45 69.832,22.524 69.832,21.596 68.878,20.642 45.028,20.642 44.161,21.51 C10.2
P1B3: C16.2 J4.6 R16.1 U1.44 | length 53.4
  Top Layer w0.2: R16.1 41.737,26.87 C16.2 ; J4.6 46.87,30.803 44.929,30.803 43.361,29.234 43.361,28.699 42.371,27.71 40.159,27.71 39.369,26.92 C16.2 ; U1.44 70.467,22.524 70.467,21.595 69.114,20.242 40.337,20.242 39.243,21.336 39.243,26.744 C16.2
P1B4: C5.2 J5.4 R5.1 U1.43 | length 55.9
  Top Layer w0.2: J5.4 30.023,31.24 33.149,31.24 33.528,30.861 33.528,27.913 34.38,27.062 C5.2 ; R5.1 34.358,27.033 C5.2 ; U1.43 71.102,22.524 71.102,21.593 69.351,19.842 38.255,19.842 34.38,23.718 C5.2
P1B5: C11.2 J5.5 R11.1 U1.42 | length 60.7
  Top Layer w0.2: J5.5 27.178,30.226 27.9,29.504 27.9,27.912 27.05,27.062 C11.2 29.494,27.012 R11.1 29.508,23.578 30.099,22.987 34.474,22.987 38.019,19.442 69.587,19.442 71.737,21.592 71.737,22.524 U1.42
P1B6: C17.2 J5.6 R17.1 U1.41 | length 64.2
  Top Layer w0.2: C17.2 R17.1 ; J5.6 25.908,28.418 24.538,27.048 R17.1 ; U1.41 72.372,22.524 72.372,21.59 69.824,19.042 37.783,19.042 34.332,22.493 25.386,22.493 24.538,23.341 R17.1
P1B7: C6.2 J6.4 R6.1 U1.40 | length 73.6
  Top Layer w0.2: J6.4 12.812,29.972 13.716,29.972 14.45,29.238 14.45,28.054 15.584,26.92 C6.2 ; R6.1 C6.2@15.504,26.899 ; C6.2@15.984,26.42 17.654,24.75 22.493,24.75 25.2,22.043 34.096,22.043 37.496,18.642 70.06,18.642 73.007,21.589 73.007,22.524 U1.40
P2B0: S1.4 U1.28 | length 52.2
  Top Layer w0.2: S1.4 33.996,20.233 36.887,17.342 76.374,17.342 80.627,21.595 80.627,22.524 U1.28
P2B1: R35.2 S1.3 U1.27 | length 74
  Top Layer w0.2: S1.3 32.987,17.693 33.787,16.892 76.561,16.892 81.262,21.593 81.262,22.524 81.425,22.688 81.425,23.615 81.63,23.82 84.61,23.82 85.722,22.708 91.772,22.708 93.586,24.523 94.374,24.523 96.325,22.571 98.428,20.468 R35.2
P2B3: R30.2 S1.2 U1.22 | length 103
  Top Layer w0.2: S1.2 32.467,15.113 34.036,15.113 34.29,14.859 34.29,9.644 37.965,5.969 v1(43.053,5.969) ; v1(51.435,6.096) v1(65.278,6.096) ; U1.22 81.425,13.036 81.425,15.319 82.718,16.612 84.682,16.612 86.993,18.923 98.327,18.923 99.242,18.008 R30.2 99.064,17.78 v1(97.282,17.78)
  Bottom Layer w0.2: v1(43.053,5.969) 51.308,5.969 v1(51.435,6.096) ; v1(65.278,6.096) 66.225,7.043 66.225,10.473 67.751,11.999 71.872,11.999 74.232,14.359 74.232,14.367 76.032,16.167 84.871,16.167 85.044,15.994 93.883,15.994 95.669,17.78 v1(97.282,17.78)
P3B0: R19.2 U1.9 | length 10.6
  Top Layer w0.2: R19.2 67.255,7.132 67.655,7.532 67.705,7.532 68.174,8.001 68.845,8.001 68.862,8.018 70.487,8.018 70.978,8.509 72.604,8.509 73.088,8.994 U1.9
P3B1: R25.2 U1.10 | length 9
  Top Layer w0.2: R25.2 69.507,7.168 69.907,7.568 70.673,7.568 71.13,8.025 72.756,8.025 73.724,8.992 U1.10
P3B2: R31.2 U1.11 | length 7.3
  Top Layer w0.2: R31.2 71.775,7.175 72.175,7.575 72.943,7.575 74.358,8.991 U1.11
P3B3: R36.2 U1.12 | length 6.3
  Top Layer w0.2: R36.2 74.015,7.152 74.415,7.552 74.465,7.552 74.993,8.081 U1.12
P3B4: R20.2 U1.14 | length 5.9
  Top Layer w0.2: U1.14 76.263,7.135 R20.2
P3B5: R26.2 U1.15 | length 6.6
  Top Layer w0.2: U1.15 76.898,11.493 78.588,9.804 R26.2
P3B6: R32.2 U1.16 | length 7.3
  Top Layer w0.2: U1.16 77.534,11.561 80.871,8.224 R32.2
P3B7: R37.2 U1.17 | length 8.2
  Top Layer w0.2: U1.17 78.168,11.747 82.498,7.418 82.824,7.418 R37.2
P4B0: R21.2 U1.39 | length 5.2
  Top Layer w0.2: R21.2 71.755,26.913 73.724,24.945 U1.39
P4B1: R27.2 U1.38 | length 4.3
  Top Layer w0.2: U1.38 74.358,26.892 R27.2
P4B2: R33.2 U1.37 | length 5.1
  Top Layer w0.2: U1.37 74.993,24.929 76.916,26.852 R33.2
P4B3: R38.2 U1.36 | length 6.1
  Top Layer w0.2: U1.36 75.71,22.688 75.71,23.615 78.548,26.452 78.973,26.452 79.373,26.852 R38.2
P4B4: R22.2 U1.34 | length 19.7
  Top Layer w0.2: U1.34 76.98,22.688 76.98,23.619 78.981,25.62 85.356,25.62 86.467,24.508 91.026,24.508 92.532,26.014 92.532,26.206 93.178,26.852 R22.2
P4B5: R28.2 U1.33 | length 21.9
  Top Layer w0.2: U1.33 77.615,22.688 77.615,23.617 79.168,25.17 85.169,25.17 86.281,24.058 91.213,24.058 93.027,25.873 95.579,25.873 95.696,25.99 R28.2
P4B6: R34.2 U1.32 | length 24.3
  Top Layer w0.2: U1.32 78.25,22.688 78.25,23.616 79.354,24.72 84.983,24.72 86.094,23.608 91.399,23.608 93.214,25.423 98.277,25.423 98.394,25.54 R34.2
P4B7: R39.2 U1.31 | length 26.5
  Top Layer w0.2: U1.31 78.885,22.688 78.885,23.615 79.54,24.27 84.797,24.27 85.908,23.158 91.585,23.158 93.4,24.973 100.845,24.973 101.099,25.227 101.099,26.861 R39.2
P5B0: C12.2 J6.5 R12.1 U1.30 | length 86.5
  Top Layer w0.2: J6.5 8.758,32.256 7.326,30.824 7.326,27.799 8.176,26.949 C12.2 10.603,26.899 13.202,24.3 22.306,24.3 25.014,21.593 33.909,21.593 37.259,18.242 76.002,18.242 79.357,21.597 79.357,22.524 U1.30
P5B1: C18.2 J6.6 R18.1 U1.29 | length 90
  Top Layer w0.2: C18.2 R18.1 ; J6.6 6.598,31.866 6.598,27.942 5.605,26.949 R18.1 ; U1.29 79.992,22.524 79.992,21.596 76.188,17.792 37.073,17.792 33.723,21.143 24.827,21.143 22.12,23.85 13.015,23.85 12.735,24.13 8.375,24.13 6.055,26.449 6.005,26.449 5.605,26.849 R18.1
P5B2: R23.2 U1.18 | length 14
  Top Layer w0.2: U1.18 78.843,12.915 78.843,11.908 79.828,10.922 83.566,10.922 87.823,15.179 R23.2
P5B3: R29.2 U1.19 | length 13.9
  Top Layer w0.2: U1.19 79.52,12.872 79.52,11.945 80.036,11.43 83.237,11.43 89.03,17.223 89.207,17.223 R29.2
RST: COM1.8 COM2.8 P1.8 P2.8 U1.35 | length 188.6
  Top Layer w0.2: P1.8 4.788,0.927 41.846,0.927 49.043,8.124 COM2.8 ; U1.35 76.295,22.574 76.295,20.987 v1(76.327,20.955) ; v1(102.997,21.971) v1(107.823,21.971) ; v1(108.1,11.709) 107.559,11.709 107.442,11.592 107.442,4.836 105.339,2.733 102.476,2.733 100.775,4.434 100.775,6.016 98.6,8.191 COM1.8 98.005,9.104 97.48,9.104 96.039,10.545 96.039,12.153 98.346,14.46 113.774,14.46 P2.8
  Bottom Layer w0.2: COM2.8 49.043,16.785 56,23.742 64.77,23.742 64.951,23.561 73.721,23.561 v1(76.327,20.955) 79.643,20.955 80.567,21.879 84.039,21.879 85.711,20.207 87.846,20.207 88.652,21.013 88.652,21.021 89.803,22.173 102.525,22.173 102.726,21.971 v1(102.997,21.971) ; v1(107.823,21.971) 107.962,21.832 107.962,11.848 v1(108.1,11.709)
  other v1: 84.074,21.844
SCL: COM1.2 COM2.2 P1.2 P2.2 R43.1 U1.20 | length 172.2
  Top Layer w0.2: R43.1 35.671,4.904 36.765,3.81 v1(40.513,3.81) ; COM2.2 53.198,11.599 57.281,15.682 77.155,15.682 v1(77.978,14.859) 78.095,14.976 78.978,14.976 79.992,13.963 79.992,13.036 U1.20 ; v1(87.249,3.429) 87.249,3.567 91.059,7.377 v1(91.059,7.516) ; v1(102.87,3.683) 102.812,3.741 102.812,11.292 COM1.2 102.755,11.667 104.197,13.109 113.797,13.109 118.745,8.161 118.745,6.731 P2.2
  Bottom Layer w0.2: P1.2 13.871,7.084 14.886,7.084 16.976,4.994 ccw(c19,7) 16.994,4.976 18.228,3.742 40.445,3.742 v1(40.513,3.81) 40.749,3.81 41.13,3.429 51.181,3.429 53.198,5.446 COM2.2 ; v1(77.978,14.859) 78.941,14.859 79.058,14.742 79.058,12.001 83.86,7.199 90.471,7.199 90.788,7.516 v1(91.059,7.516) ; v1(87.249,3.429) 87.376,3.556 102.743,3.556 v1(102.87,3.683)
SDA: COM1.3 COM2.3 P1.3 P2.3 R42.1 U1.21 | length 147
  Top Layer w0.2: P1.3 5.788,12.627 5.788,5.701 9.799,1.691 28.996,1.691 29.328,2.023 29.328,4.854 29.728,4.454 29.778,4.454 31.946,2.286 42.097,2.286 47.809,7.998 47.809,9.188 49.308,10.687 49.833,10.687 COM2.3 50.428,11.599 54.961,16.132 79.621,16.132 v1@80.686,15.068 ; v1(80.525,14.999) 80.617,14.999 v1@80.686,15.068 ; U1.21 80.627,13.036 80.738,13.147 80.738,14.957 80.767,14.986 v1@80.686,15.068 ; v1(87.857,13.87) 87.885,13.842 88.64,13.842 v1(90.484,11.998) ; COM1.3 99.985,11.667 101.877,13.559 114.457,13.559 P2.3
  Bottom Layer w0.2: v1(80.525,14.999) 80.617,14.999 81.377,15.759 84.147,15.759 84.155,15.767 84.494,15.767 85.275,14.986 86.741,14.986 v1(87.857,13.87) ; v1(90.484,11.998) 90.671,11.811 92.927,11.811 93.958,12.842 97.702,12.842 98.859,11.684 99.65,11.684 COM1.3
pads on no net: COM1.4 COM1.6 COM1.9 COM1.10 COM1.11 COM2.4 COM2.6 COM2.9 COM2.10 COM2.11 J1.0 J2.0 J3.0 J4.0 J5.0 J6.0 P1.4 P1.6 P2.4 P2.6 U1.25

## Polygon pours and split planes (outlines as drawn)
GND on Top Layer "GND_L01_P000" (solid, pour order 0): 0.127,0 0,0.127 0,50.038 132.461,50.038 132.461,0
GND on Bottom Layer "GND_L02_P002" (solid, pour order 2): 0,0 132.461,0 132.461,49.987 132.465,49.992 0.013,49.992

## Keep-outs
Keep-Out Layer:
  the board outline again, w0.254

## Other copper
Bottom Layer:
  text "VO MINH HAU" at 46.736,14.224 h1

## Text inside footprints (layer, text, board x,y; h text height)
C21: Top Overlay "+" at 11.138,14.248 h1.2 r180
COM1: Top Overlay "1" at 107.986,11.834 h1.02 r180; Top Overlay "5" at 92.238,11.834 h1.02 r180; Top Overlay "9" at 96.048,6.627 h1.02 r180; Top Overlay "6" at 104.43,6.627 h1.02 r180; Top Overlay "FMALE" at 103.795,2.69 h1.52 r180
COM2: Top Overlay "1" at 58.429,11.767 h1.02 r180; Top Overlay "5" at 42.681,11.767 h1.02 r180; Top Overlay "9" at 46.491,6.56 h1.02 r180; Top Overlay "6" at 54.873,6.56 h1.02 r180; Top Overlay "FMALE" at 54.238,2.623 h1.52 r180
U1: Top Overlay "*" at 67.729,12.383 h1.27 r90; Top 3D Body "*" at 68.656,14.046 h1.27 r90